# Altium PCB Main_board.PcbDoc
Units mil, origin at the board's own origin, x right, y up, seen from the top; angles counter-clockwise.
Board outline 4724.41 x 4330.71 mil, 2 copper layers (Top Layer, Bottom Layer); 36 components, 29 nets, 156 pads, 0 vias.
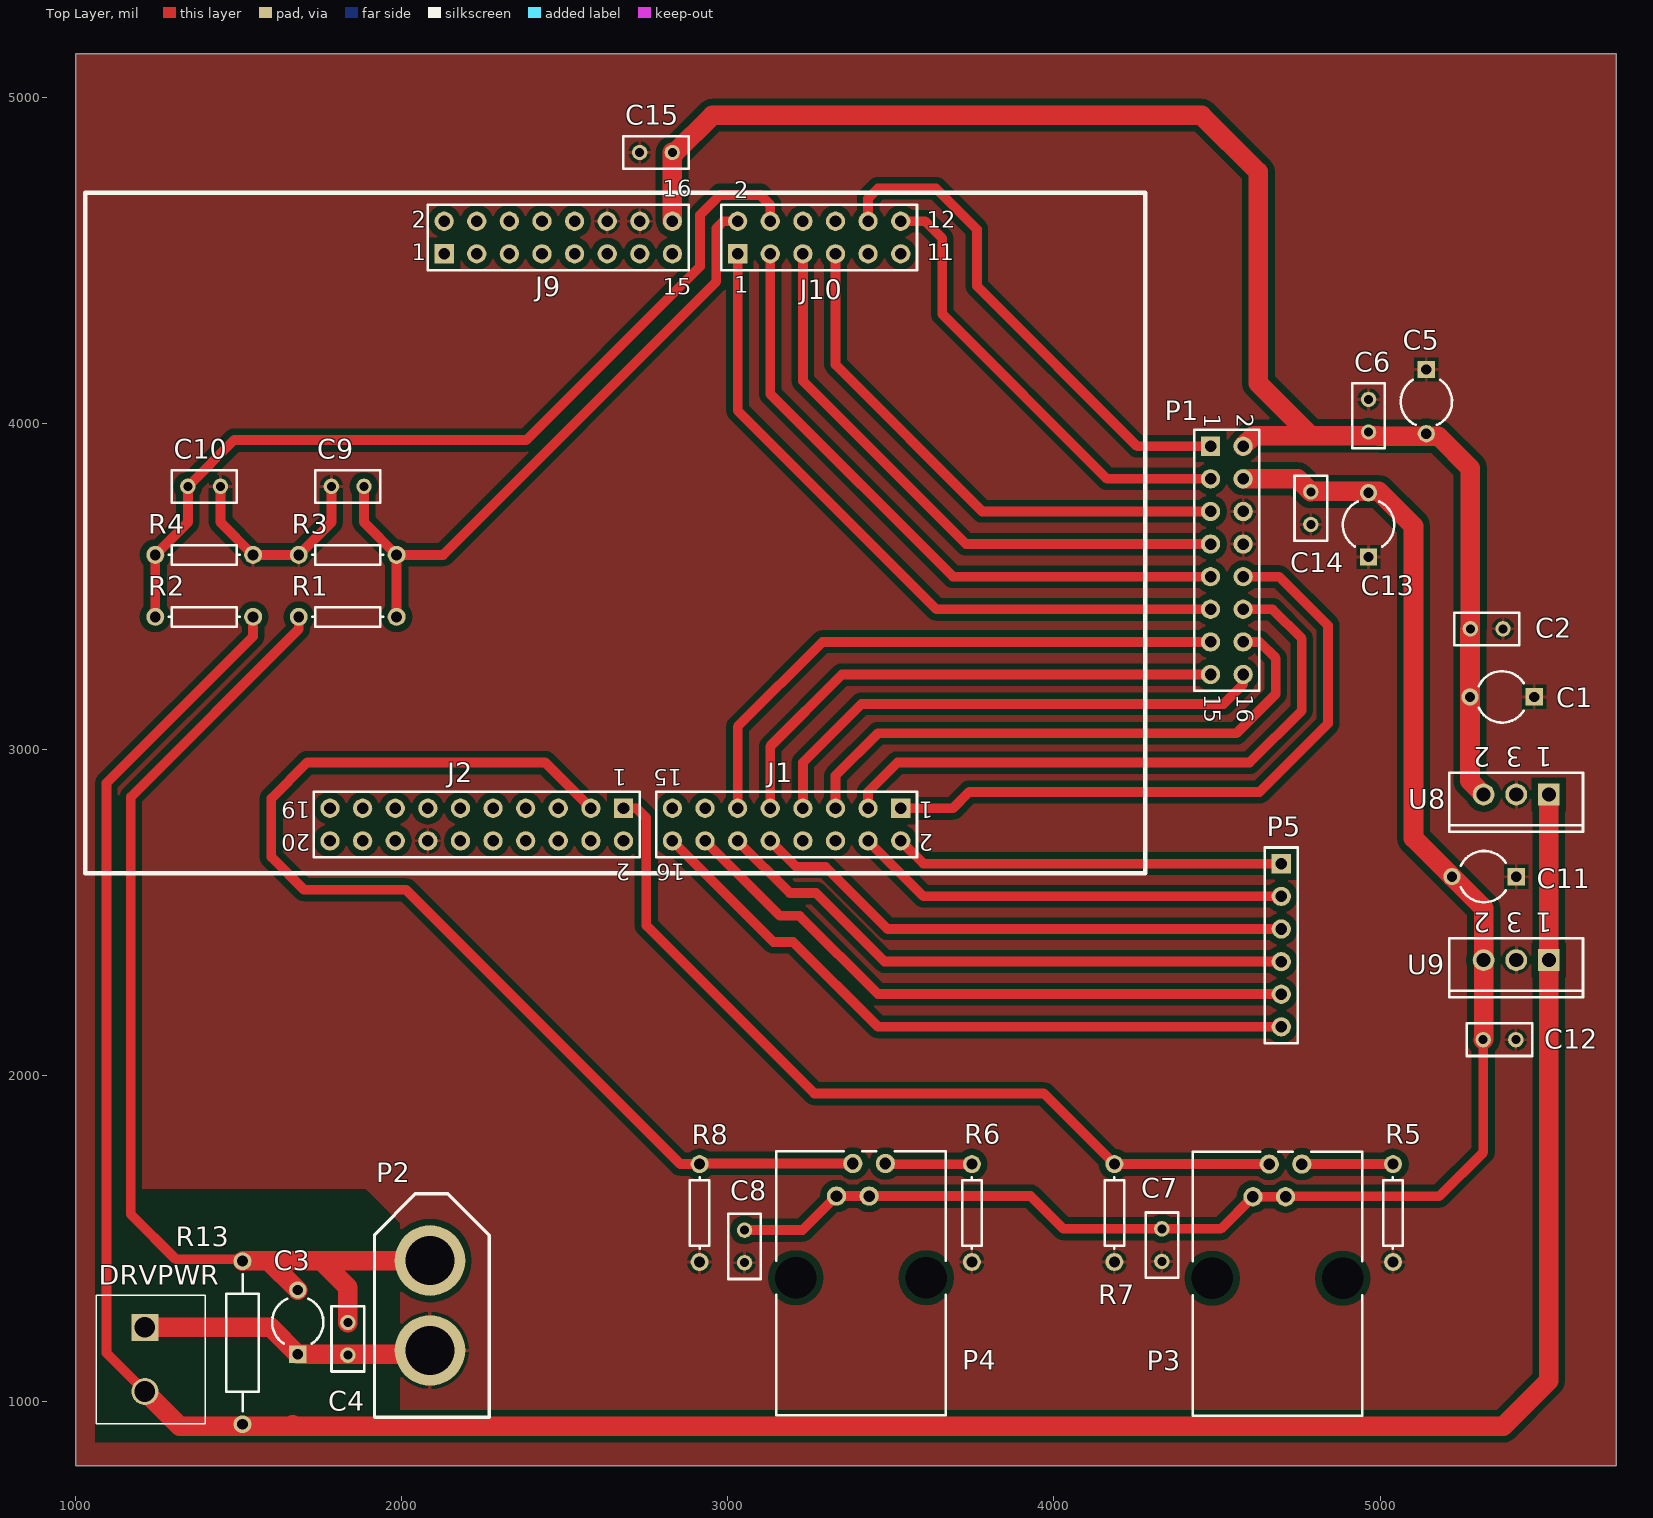
[diagram p0: Top Layer view]
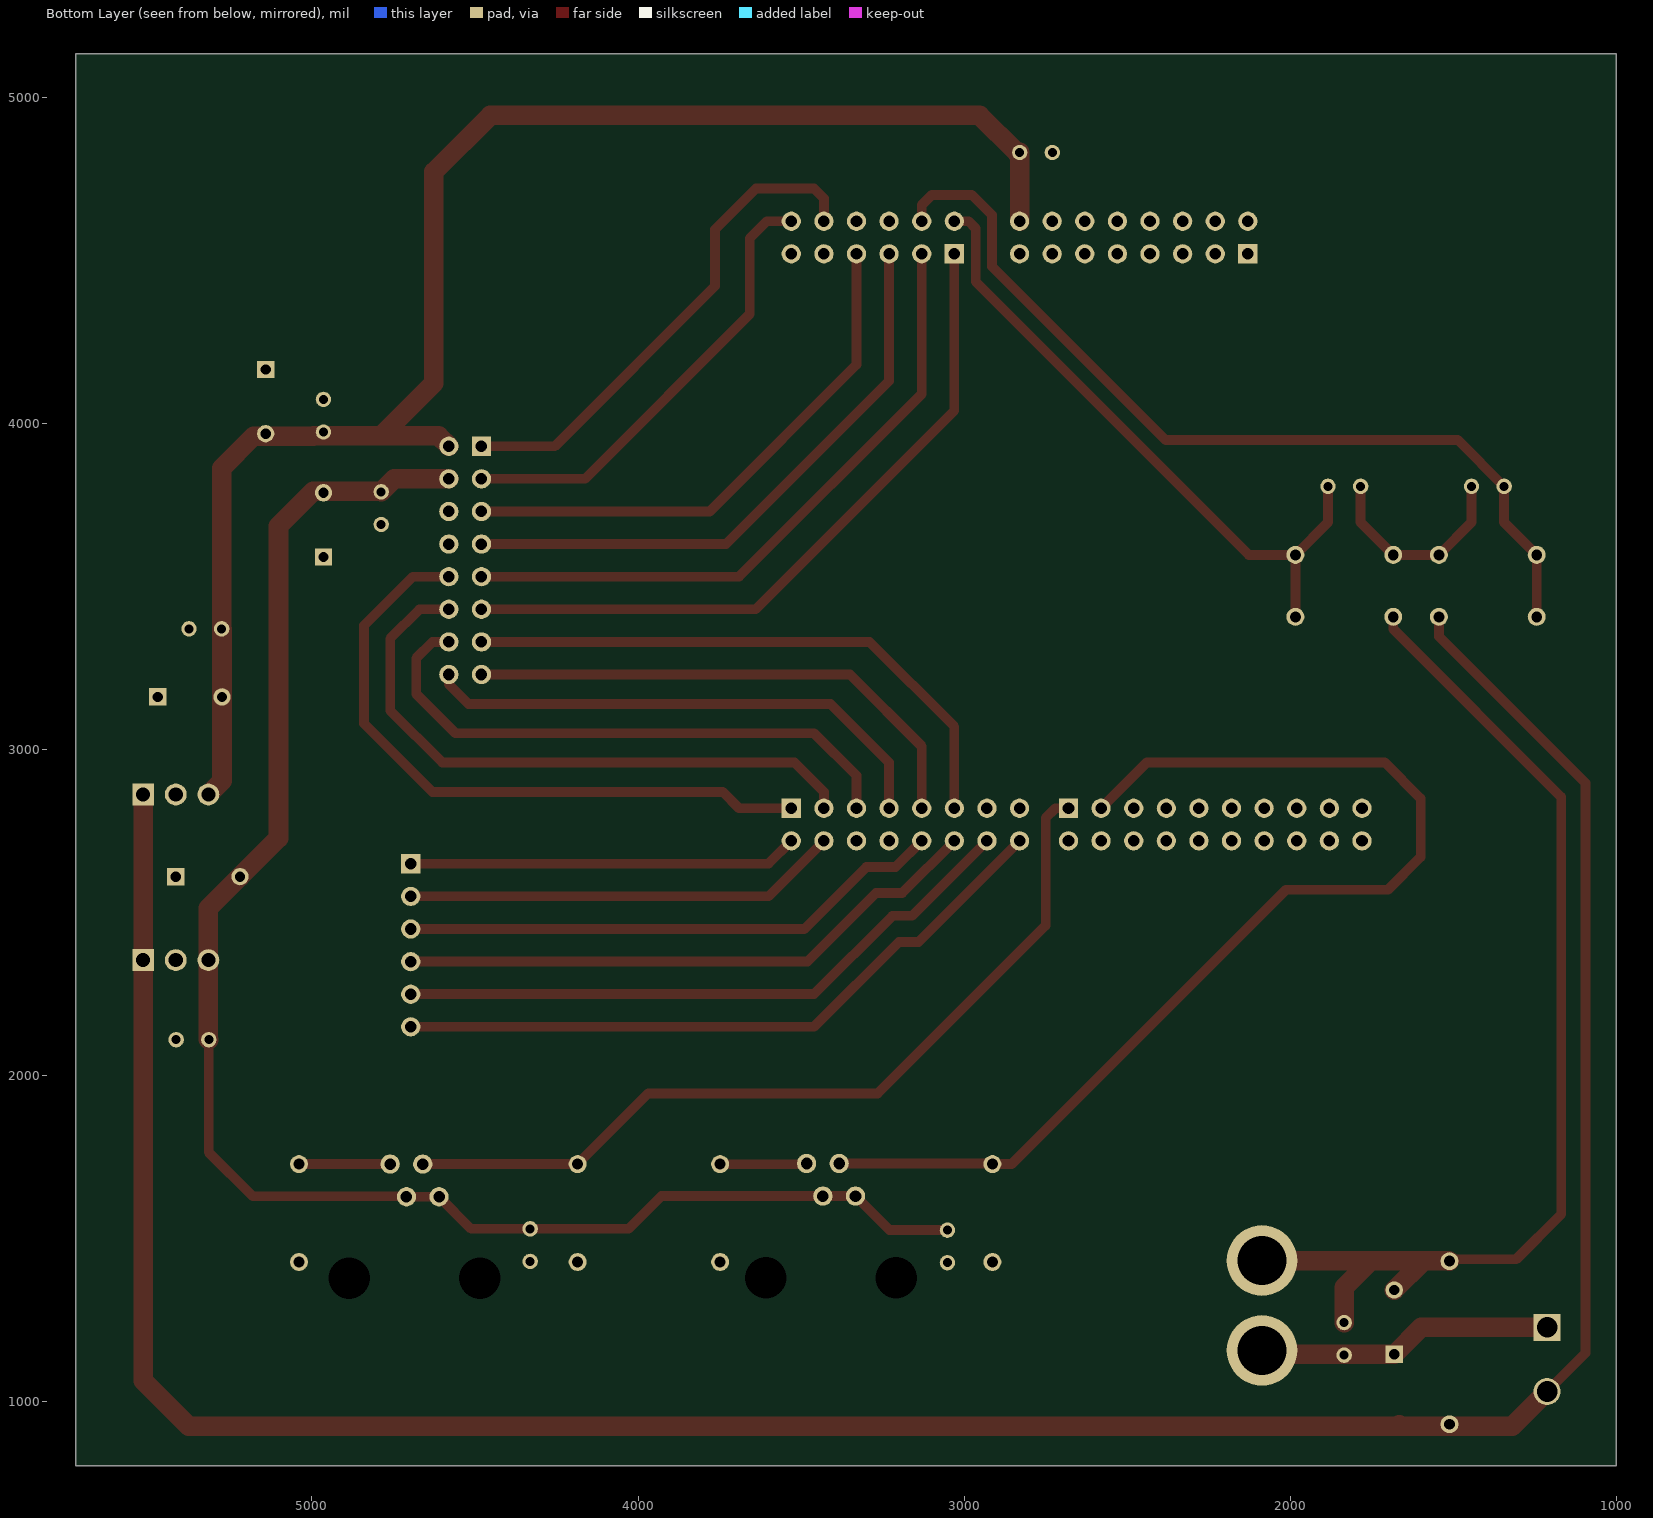
[diagram p1: Bottom Layer view, seen from below]

## Layer stack, top to bottom
Top Solder: solder mask 0.4, Solder Resist, Dk 3.5
Top Layer: signal copper 1.4
Dielectric 1: dielectric 12.6, FR-4, Dk 4.8
Bottom Layer: signal copper 1.4
Bottom Solder: solder mask 0.4, Solder Resist, Dk 3.5

## Board outline
1000,803.15 1000,5133.86 5724.41,5133.86 5724.41,803.15

## Design rules (kind name [scope] priority, off if disabled: settings)
Clearance [All] p1: gap=20
PolygonConnect [All] p1: connectstyle=Relief reliefconductorwidth=10 reliefentries=4 polygonreliefangle="90 Angle" airgapwidth=10
RoutingVias [All] p1: holewidth=28 width=50 viastyle="Through Hole" minholewidth=28 minwidth=50 maxholewidth=28 maxwidth=50
SolderMaskExpansion [All] p1: expansion=4
Width [All] p1: maxlimit=60 minlimit=20 preferedwidth=20
30 further rules are at their usual default settings.

## Components (designator, comment, footprint, x,y, rotation, side; value= is the part's Value field where it differs from the comment)
C1 "Cap2" CAPR5-4X5 5374.02,3161.42 r180 top
C2 "Cap" RAD-0.1 5326.77,3370.08 r180 top
C3 "Cap2" CAPR5-4X5 1681.1,1244.09 r90 top
C4 "Cap" RAD-0.1 1834.65,1192.91 r90 top
C5 "Cap2" CAPR5-4X5 5141.73,4066.93 r270 top
C6 "Cap" RAD-0.1 4964.57,4023.62 r270 top
C7 "Cap" RAD-0.1 4330.71,1480.31 r90 top
C8 "Cap" RAD-0.1 3051.18,1476.38 r90 top
C9 "Cap" RAD-0.1 1834.17,3806.93 r0 top
C10 "Cap" RAD-0.1 1394.17,3806.93 r180 top
C11 "Cap2" CAPR5-4X5 5318.9,2610.24 r180 top
C12 "Cap" RAD-0.1 5366.14,2110.24 r180 top
C13 "Cap2" CAPR5-4X5 4964.57,3688.98 r90 top
C14 "Cap" RAD-0.1 4787.4,3740.16 r90 top
C15 "Cap" RAD-0.1 2779.53,4830.71 r0 top
DRVPWR "DRV_PWR" 691311700002 1212.6,1129.92 r270 top
J1 "Header 8X2" HDR2X8 3530,2820 r180 top
J2 "Header 10X2" HDR2X10 2680,2820 r180 top
J9 "Header 8X2" HDR2X8 2130,4520 r0 top
J10 "Header 6X2" HDR2X6 3030,4520 r0 top
P1 "Header 8X2" HDR2X8 4480,3930 r270 top
P2 "XT60" PCBComponent_1 2086.61,1295.28 r0 top
P3 "Enc2" 43249-6104 4685.04,956.69 r0 top
P4 "Enc2" 43249-6104 3408.11,958.66 r0 top
P5 "Driver" HDR1X6 4696.85,2649.61 r270 top
R1 "Res3" AXIAL-0.3 1834.17,3406.93 r180 top
R2 "Res3" AXIAL-0.3 1394.17,3406.93 r0 top
R3 "Res3" AXIAL-0.3 1834.17,3596.93 r0 top
R4 "Res3" AXIAL-0.3 1394.17,3596.93 r180 top
R5 "Res3" AXIAL-0.3 5039.37,1578.74 r270 top
R6 "Res3" AXIAL-0.3 3748.11,1578.66 r270 top
R7 "Res3" AXIAL-0.3 4185.04,1578.74 r90 top
R8 "Res3" AXIAL-0.3 2913.39,1578.74 r270 top
R13 "Res3" AXIAL-0.5 1511.81,1181.1 r270 top
U8 "L7805ABV" TO220ABN 5417.32,2862.2 r180 top
U9 "LM1117 3V3" TO220VW 5417.32,2354.33 r180 top

## Footprints (in the part's own frame and the unit in brackets; to place one, negate y for a bottom-side part, rotate by r counter-clockwise, add the part's x,y. Pads: shape width x height; smd on the part's side, far side on the other; paste and mask are expansions set on the pad)
43249-6104 [mm] "Connector; PCB Jack, Thru-Hole; 1-Port, 6 Positions, 4 Loaded; Unshielded without Lightpipes; Right Angle"
  round 1.5 hole 0.9: 1(-1.905,17.07) 2(-0.635,19.61) 3(0.635,17.07) 4(1.905,19.61)
  round 2.95 hole 3.25 unplated: MH1(-5.08,10.72) MH2(5.08,10.72)
  silkscreen extent -6.6,0 6.6,20.57
691311700002 [mm] "5.00mm - Open Vertical PCB Header - 02p"
  rect 2.1x2.1 hole 1.6: 1(-2.5,0)
  round 2.1 hole 1.6: 2(2.5,0)
  silkscreen extent -5,-3.8 5,4.7, body extent -5,-3.8 5,4.7, height 12.01
AXIAL-0.3 [mm] "Axial Device, Thru-Hole; 2 Leads; 0.3 in Pin Spacing"
  round 1.4 hole 0.85: 1(-3.81,0) 2(3.81,0)
  silkscreen extent -2.77,-0.76 2.77,0.76
AXIAL-0.5 [mm] "Axial Device, Thru-Hole; 2 Leads; 0.5 in Pin Spacing"
  round 1.4 hole 0.85: 1(-6.35,0) 2(6.35,0)
  silkscreen extent -5.33,-1.27 5.33,1.27
CAPR5-4X5 [mm] "Capacitor; 2 Leads"
  rect 1.35x1.35 hole 0.8: 1(-2.5,0)
  round 1.35 hole 0.8: 2(2.5,0)
  silkscreen extent -1.69,-2 1.82,2
HDR1X6 [mm] "Connector; Header; 6 Position"
  rect 1.5x1.5 hole 0.9: 1(0,0)
  round 1.5 hole 0.9: 2(2.54,0) 3(5.08,0) 4(7.62,0) 5(10.16,0) 6(12.7,0)
  silkscreen extent -1.27,-1.27 13.97,1.27
HDR2X6 [mm] "Connector; Header; 6x2 Position"
  rect 1.5x1.5 hole 0.9: 1(0,0)
  round 1.5 hole 0.9: 2(0,2.54) 3(2.54,0) 4(2.54,2.54) 5(5.08,0) 6(5.08,2.54) 7(7.62,0) 8(7.62,2.54) 9(10.16,0) 10(10.16,2.54) 11(12.7,0) 12(12.7,2.54)
  silkscreen extent -1.27,-1.27 13.97,3.81
HDR2X8 [mm] "Connector; Header; 8x2 Position"
  rect 1.5x1.5 hole 0.9: 1(0,0)
  round 1.5 hole 0.9: 2(0,2.54) 3(2.54,0) 4(2.54,2.54) 5(5.08,0) 6(5.08,2.54) 7(7.62,0) 8(7.62,2.54) 9(10.16,0) 10(10.16,2.54) 11(12.7,0) 12(12.7,2.54) 13(15.24,0) 14(15.24,2.54) 15(17.78,0) 16(17.78,2.54)
  silkscreen extent -1.27,-1.27 19.05,3.81
HDR2X10 [mm] "Connector; Header; 10x2 Position"
  rect 1.5x1.5 hole 0.9: 1(0,0)
  round 1.5 hole 0.9: 2(0,2.54) 3(2.54,0) 4(2.54,2.54) 5(5.08,0) 6(5.08,2.54) 7(7.62,0) 8(7.62,2.54) 9(10.16,0) 10(10.16,2.54) 11(12.7,0) 12(12.7,2.54) 13(15.24,0) 14(15.24,2.54) 15(17.78,0) 16(17.78,2.54) 17(20.32,0) 18(20.32,2.54) 19(22.86,0) 20(22.86,2.54)
  silkscreen extent -1.27,-1.27 24.13,3.81
PCBComponent_1 [mm]
  round 5.5 hole 3.8: 1(0,3.5) 2(0,-3.5)
  silkscreen extent -4.32,-8.7 4.62,8.7
RAD-0.1 [mm] "Radial Cap, Thru-Hole; 2 Leads; 0.1 in Pin Spacing"
  round 1.2 hole 0.7: 1(-1.27,0) 2(1.27,0)
  silkscreen extent -2.54,-1.27 2.54,1.27
TO220ABN [mm] "TO, Thru-Hole, Vertical, Heatsink Mounted; 3 In-Line Leads; Pitch 2.54 mm; Pin sequence 1, 3, 2"
  rect 1.7x1.7 hole 1.1: 1(-2.54,0)
  round 1.7 hole 1.1: 2(2.54,0) 3(0,0)
  silkscreen extent -5.2,-1.7 5.2,2.9
TO220VW [mm] "TO, Thru-Hole, Vertical, Heatsink Mounted; 3 In-Line Leads; Pitch 2.54 mm; Pin sequence 1, 3, 2"
  rect 1.7x1.7 hole 1.1: 1(-2.54,0)
  round 1.7 hole 1.1: 2(2.54,0) 3(0,0)
  silkscreen extent -5.2,-1.7 5.2,2.9

## Part data
C1 C2 C3 C4 C5 C6 C7 C8 C9 C10 C11 C12 C13 C14 C15: "Capacitor"
DRVPWR: library part 691311700002, "WR-TBL Terminal block - serie 3117 - 5.00mm"
J1 J9 P1: "Header, 8-Pin, Dual row"
J2: "Header, 10-Pin, Dual row"
J10: "Header, 6-Pin, Dual row"
P2: library part Component_1
P3 P4: library part 43249-6104, "Right Angle, Low Profile, Flangeless, Unshielded PCB Jack"
P5: library part "Header 6", "Header, 6-Pin"
R1 R2 R3 R4 R5 R6 R7 R8 R13: "Resistor"
U8: "Precision 1A Regulator"
U9: library part L78S05CV, "2A Positive Voltage Regulator"

## Nets (pads, with @x,y where several pads share a name; then routed paths per layer and width w, separated by ;. In a path a pad name is that pad's centre, name@x,y a point inside that pad or via, vN(x,y) a via of type N, cw(c..) or ccw(c..) an arc to the next point about the centre after c; other vN are vias at no path point)
GND: C1.1 C2.1 C3.1 C4.1 C5.1 C6.1 C7.1 C8.1 C9.1 C10.1 C11.1 C12.1 C13.1 C14.1 C15.1 DRVPWR.1 J2.14 J9.12 J9.14 P1.6 P1.8 P2.2 R3.1 R4.1 R5.2 R6.2 R7.1 R8.2 U8.3 U9.3 | length 1572.7
  Top Layer w30: C10.1 1444.17,3696.93 R4.1 R3.1 1784.17,3696.93 C9.1
  Top Layer w60: DRVPWR.1 1598.43,1228.35 C3.1 P2.2@2003.94,1145.67 ; P2.2@2015.75,1157.48 P2.2@2003.94,1145.67 ; P2.2 2074.8,1145.67 P2.2@2003.94,1145.67
NetC3_2: C3.2 C4.2 P2.1 R1.2 R13.1 | length 3375.5
  Top Layer w30: R13.1 1505.91,1437.01 1307.09,1437.01 1169.29,1574.8 1169.29,2854.33 1684.17,3369.21 R1.2
  Top Layer w60: R13.1 1513.78,1433.07 1590.55,1433.07 ; C3.2 1590.55,1433.07 ; C4.2 1834.65,1350.39 1751.97,1433.07 ; P2.1 1751.97,1433.07 ; 1590.55,1433.07 1751.97,1433.07
NetC9_2: C9.2 J10.2 R1.1 R3.2 | length 2007
  Top Layer w30: C9.2 1884.17,3696.93 R3.2 ; R1.1 R3.2 ; J10.2 2986.14,4620 2964.57,4598.43 2964.57,4434.57 2126.93,3596.93 R3.2
NetC10_2: C10.2 J10.4 R2.1 R4.2 | length 2752.5
  Top Layer w30: R2.1 R4.2 1344.17,3696.93 C10.2 1486.06,3948.82 2381.89,3948.82 2914.57,4481.5 2914.57,4638.98 2976.38,4700.79 3099.17,4700.79 3130,4669.95 J10.4
NetDRVPWR_2: DRVPWR.2 R2.2 R13.2 U8.1 U9.1 | length 8820.3
  Top Layer w30: DRVPWR.2 1094.49,1149.61 1094.49,2897.24 1544.17,3346.93 R2.2
  Top Layer w60: DRVPWR.2 1318.9,925.2 1669.29,925.2 ; 1665.35,929.13 1669.29,925.2 ; U8.1 U9.1 5517.32,1064.57 5377.95,925.2 1669.29,925.2
NetJ1_1: J1.1 P1.10 | length 2039.8
  Top Layer w30: J1.1 3690,2820 3740,2870 4630,2870 4840,3080 4840,3380 4690,3530 P1.10
NetJ1_2: J1.2 P5.1 | length 1195.8
  Top Layer w30: J1.2 3600,2650 P5.1@4696.85,2650
NetJ1_3: J1.3 P1.12 | length 1920.8
  Top Layer w30: J1.3 3430,2870 3520,2960 4600,2960 4760,3120 4760,3340 4670,3430 P1.12
NetJ1_4: J1.4 P5.2 | length 1337.3
  Top Layer w30: J1.4 3600,2550 P5.2@4696.85,2550
NetJ1_5: J1.5 P1.14 | length 1784.3
  Top Layer w30: J1.5 3330,2920 3460,3050 4560,3050 4680,3170 4680,3280 4630,3330 P1.14
NetJ1_7: J1.7 P1.16 | length 1619.4
  Top Layer w30: J1.7 3230,2960 3410,3140 4520,3140 4580,3200 P1.16
NetJ1_9: J1.9 P1.15 | length 1631.1
  Top Layer w30: J1.9 3130,3010 3350,3230 P1.15
NetJ1_10: J1.10 P5.3 | length 1678.7
  Top Layer w30: J1.10 3210,2640 3300,2640 3490,2450 P5.3@4696.85,2450
NetJ1_11: J1.11 P1.13 | length 1807.7
  Top Layer w30: J1.11 3030,3070 3290,3330 P1.13
NetJ1_12: J1.12 P5.4 | length 1820.1
  Top Layer w30: J1.12 3190,2560 3270,2560 3480,2350 P5.4@4696.85,2350
NetJ1_14: J1.14 P5.5 | length 1961.5
  Top Layer w30: J1.14 3160,2490 3220,2490 3460,2250 P5.5@4696.85,2250
NetJ1_16: J1.16 P5.6 | length 2103
  Top Layer w30: J1.16 3140,2410 3200,2410 3460,2150 P5.6@4696.85,2150
NetJ2_1: J2.1 P3.2 R7.2 | length 2625.4
  Top Layer w30: J2.1 2720,2820 2750,2790 2750,2460 3265.12,1944.88 3968.9,1944.88 R7.2 P3.2
NetJ2_3: J2.3 P4.2 R8.1 | length 3437.4
  Top Layer w30: J2.3 2440,2960 1710,2960 1600,2850 1600,2670 1700,2570 2012.68,2570 2853.94,1728.74 R8.1 2915.35,1730.71 P4.2
NetJ10_1: J10.1 P1.11 | length 2182.7
  Top Layer w30: J10.1 3030,4040 3640,3430 P1.11
NetJ10_3: J10.3 P1.9 | length 2012
  Top Layer w30: J10.3 3130,4090 3690,3530 P1.9
NetJ10_5: J10.5 P1.7 | length 1847.1
  Top Layer w30: J10.5 3230,4130 3730,3630 P1.7
NetJ10_7: J10.7 P1.5 | length 1676.4
  Top Layer w30: J10.7 3330,4180 3780,3730 P1.5
NetJ10_10: J10.10 P1.1 | length 1561.4
  Top Layer w30: J10.10 3430,4689.84 3460.63,4720.47 3637.8,4720.47 3763.78,4594.49 3763.78,4421.26 4255.04,3930 P1.1
NetJ10_12: J10.12 P1.3 | length 1413.3
  Top Layer w30: J10.12 3604.41,4620 3657.48,4566.93 3657.48,4334.65 4162.13,3830 P1.3
NetP3_4: P3.4 R5.1 | length 279.3
  Top Layer w30: P3.4 R5.1
NetP4_4: P4.4 R6.1 | length 265.8
  Top Layer w30: P4.4 3485.16,1728.66 R6.1
VCC3V3: C7.2 C8.2 C11.2 C12.2 C13.2 C14.2 P1.4 P3.1 P3.3 P4.1 P4.3 U9.2 | length 5039.9
  Top Layer w30: C8.2 3228.78,1526.38 P4.1 P4.3 3928.35,1630.71 4028.74,1530.31 C7.2 4511.61,1530.31 P3.1 P3.3 4711.22,1629.92 5181.1,1629.92 5316.14,1764.96 C12.2
  Top Layer w60: P1.4 4747.56,3830 C14.2 4788.58,3791.34 4996.06,3791.34 5102.36,3685.04 5102.36,2728.35 C11.2 5317.32,2513.39 U9.2 5317.32,2111.42 C12.2
VCC5V: C1.2 C2.2 C5.2 C6.2 C15.2 J9.16 P1.2 U8.2 | length 4772.1
  Top Layer w60: J9.16 2830,4732.99 2829.53,4733.46 C15.2 2838.58,4830.71 2952.76,4944.88 4452.76,4944.88 4625.98,4771.65 4625.98,4123.23 4787.4,3961.81 ; P1.2 4611.81,3961.81 4787.4,3961.81 ; U8.2 5275.59,2903.94 C1.2 5275.59,3368.9 C2.2 5276.77,3862.2 5178.35,3960.63 4996.06,3960.63 4994.88,3961.81 4787.4,3961.81
pads on no net: J1.6 J1.8 J1.13 J1.15 J2.2 J2.4 J2.5 J2.6 J2.7 J2.8 J2.9 J2.10 J2.11 J2.12 J2.13 J2.15 J2.16 J2.17 J2.18 J2.19 J2.20 J9.1 J9.2 J9.3 J9.4 J9.5 J9.6 J9.7 J9.8 J9.9 J9.10 J9.11 J9.13 J9.15 J10.6 J10.8 J10.9 J10.11 P3.MH1 P3.MH2 P4.MH1 P4.MH2

## Polygon pours and split planes (outlines as drawn)
GND on Top Layer "Top Layer-No Net" (solid, pour order 8): 1059.19,1653.54 1059.19,874.15 1059.06,874.02 1059.8,874.77 1996.06,874.77 1996.06,803.15 1000,803.15 1000,1653.54
GND on Top Layer "Top Layer-No Net" (solid, pour order 6): 1000,5133.86 5724.41,5133.86 5724.41,803.15 2003.94,803.15 2000,803.15 1996.06,803.15 1996.06,1464.57 1996.06,1547.24 1889.76,1653.54 1000,1653.54

## Silkscreen, mask and mechanical layers (free items; w line width, h text height)
Top Overlay:
  lines w13.78: 1030,2620 1030,4706.61 4280,4706.61 4280,2620 1030,2620
Mechanical 1:
  the board outline again, w10

## Dimensions
5724.41,803.15 to 1000,803.15 on Mechanical 1
5724.41,5133.86 to 5724.41,803.15 on Mechanical 1

## Text inside footprints (layer, text, board x,y; h text height)
J1: Top Overlay "16" at 2870,2650 h50 r180; Top Overlay "15" at 2860,2940 h50 r180; Top Overlay "1" at 3630,2840 h50 r180; Top Overlay "2" at 3630,2740 h50 r180
J2: Top Overlay "2" at 2700,2650 h50 r180; Top Overlay "1" at 2690,2940 h50 r180; Top Overlay "19" at 1720,2840 h50 r180; Top Overlay "20" at 1720,2740 h50 r180
J9: Top Overlay "16" at 2800,4695 h50; Top Overlay "15" at 2800,4395 h50; Top Overlay "1" at 2030,4500 h50; Top Overlay "2" at 2030,4600 h50
J10: Top Overlay "2" at 3020,4690 h50; Top Overlay "1" at 3020,4400 h50; Top Overlay "1" at 3610,4500 h50; Top Overlay "1" at 3650,4500 h50; Top Overlay "12" at 3610,4600 h50
P1: Top Overlay "16" at 4560,3170 h50 r270; Top Overlay "15" at 4460,3170 h50 r270; Top Overlay "1" at 4460,4030 h50 r270; Top Overlay "2" at 4560,4030 h50 r270
U8: Top Overlay "3" at 5437.01,3006.89 h59.06 r180; Top Overlay "2" at 5337.01,3006.89 h59.06 r180; Top Overlay "1" at 5527.17,3006.89 h59.06 r180
U9: Top Overlay "1" at 5527.17,2499.02 h59.06 r180; Top Overlay "2" at 5337.01,2499.02 h59.06 r180; Top Overlay "3" at 5437.01,2499.02 h59.06 r180